# Altium PCB controlmodule.PcbDoc
Units mm, origin at the board's own origin, x right, y up, seen from the top; angles counter-clockwise.
Board outline 50 x 50 mm, 2 copper layers (Top Layer, Bottom Layer); 13 components, 19 nets, 70 pads, 7 vias.
Unrouted connection lines stored in the file: 1.
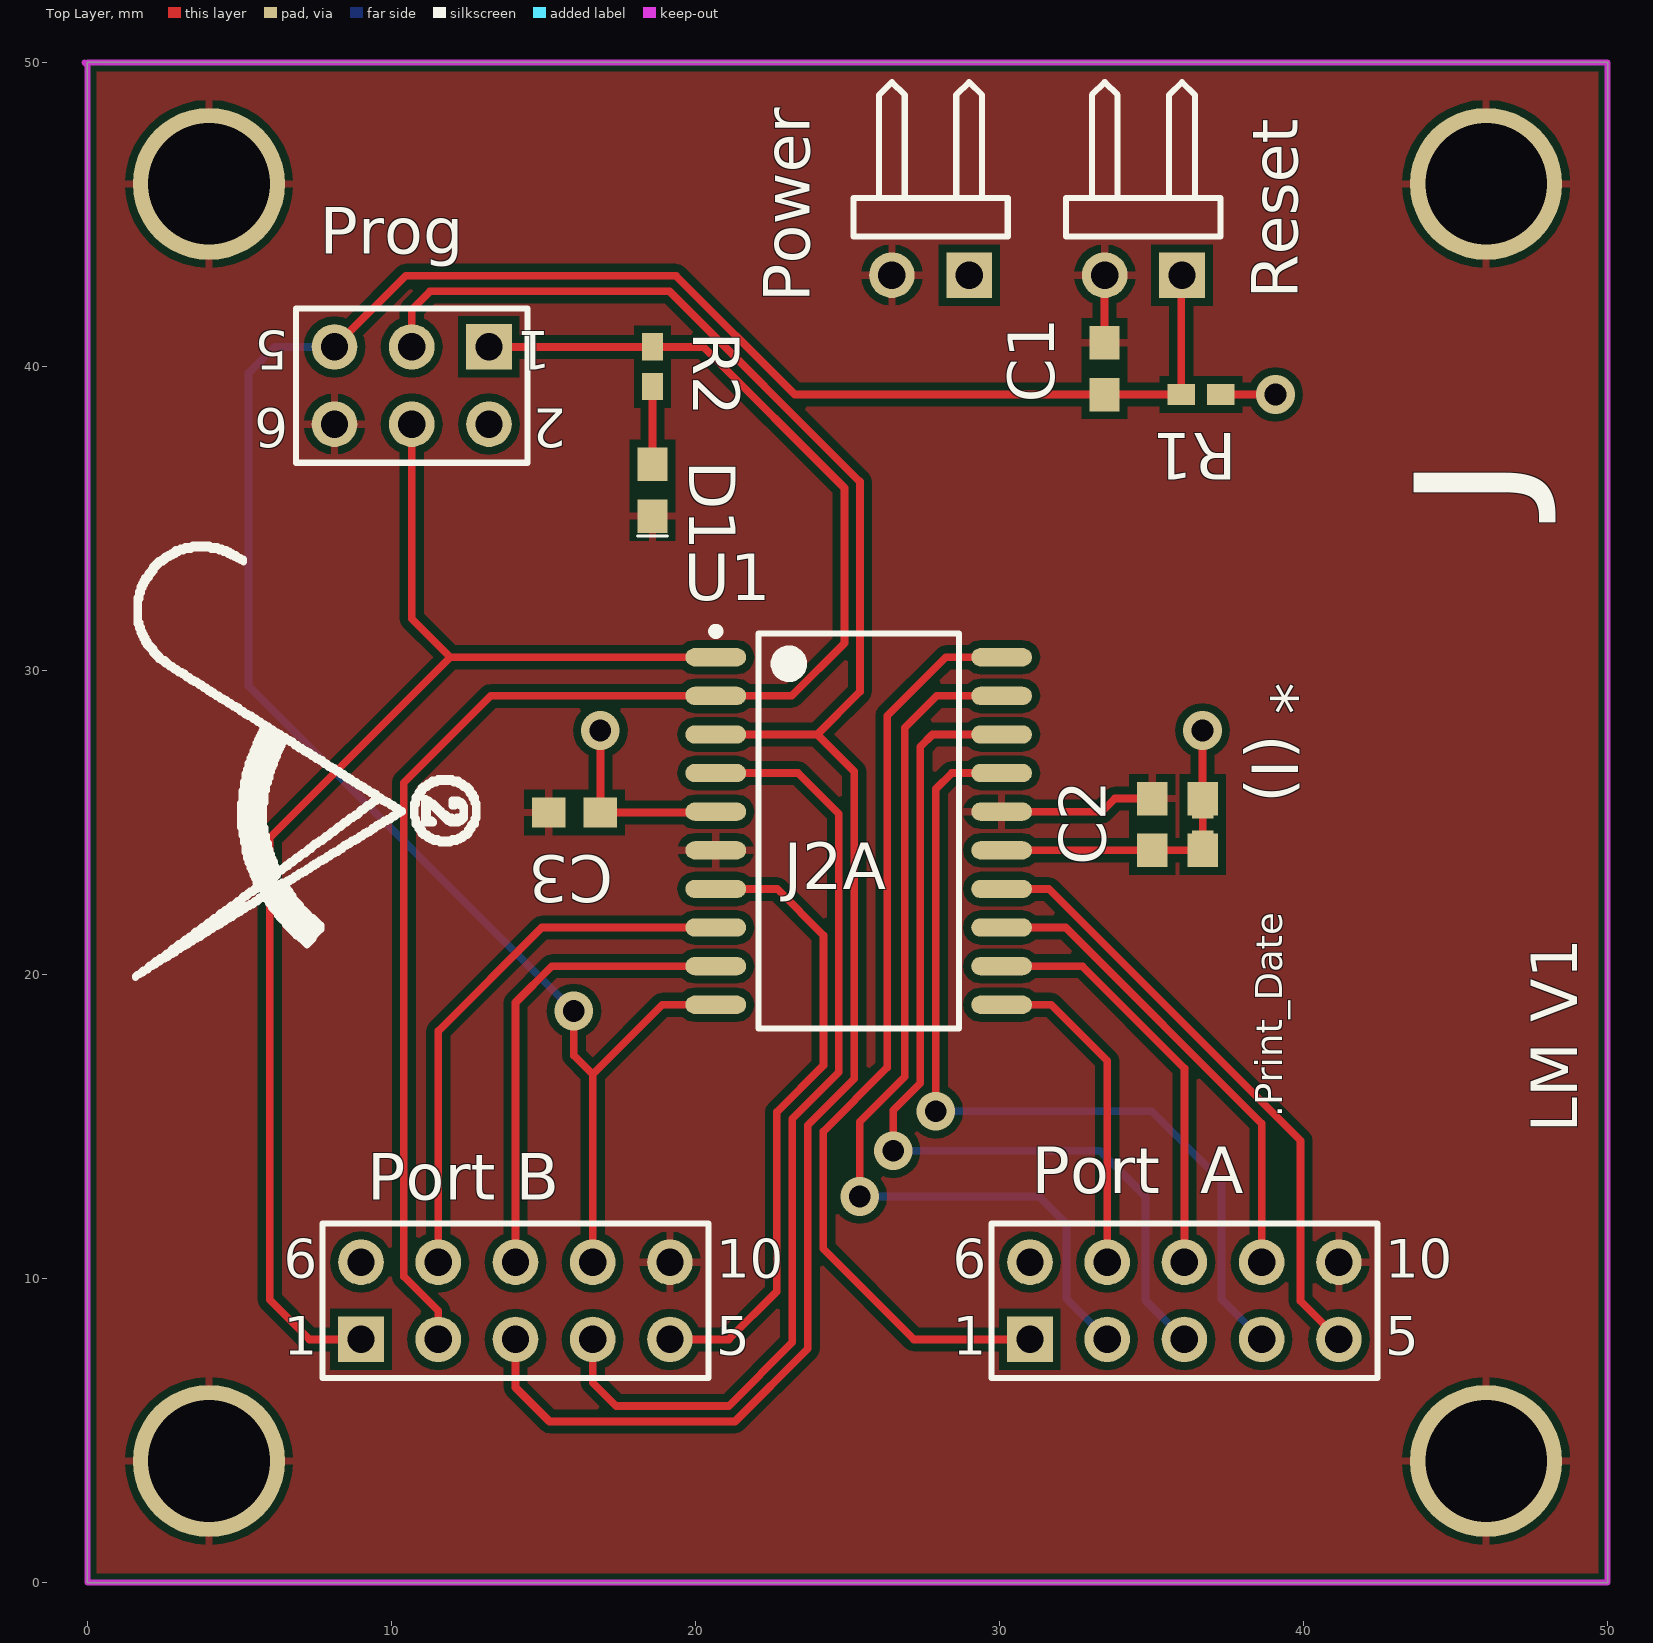
[diagram p0: Top Layer view]
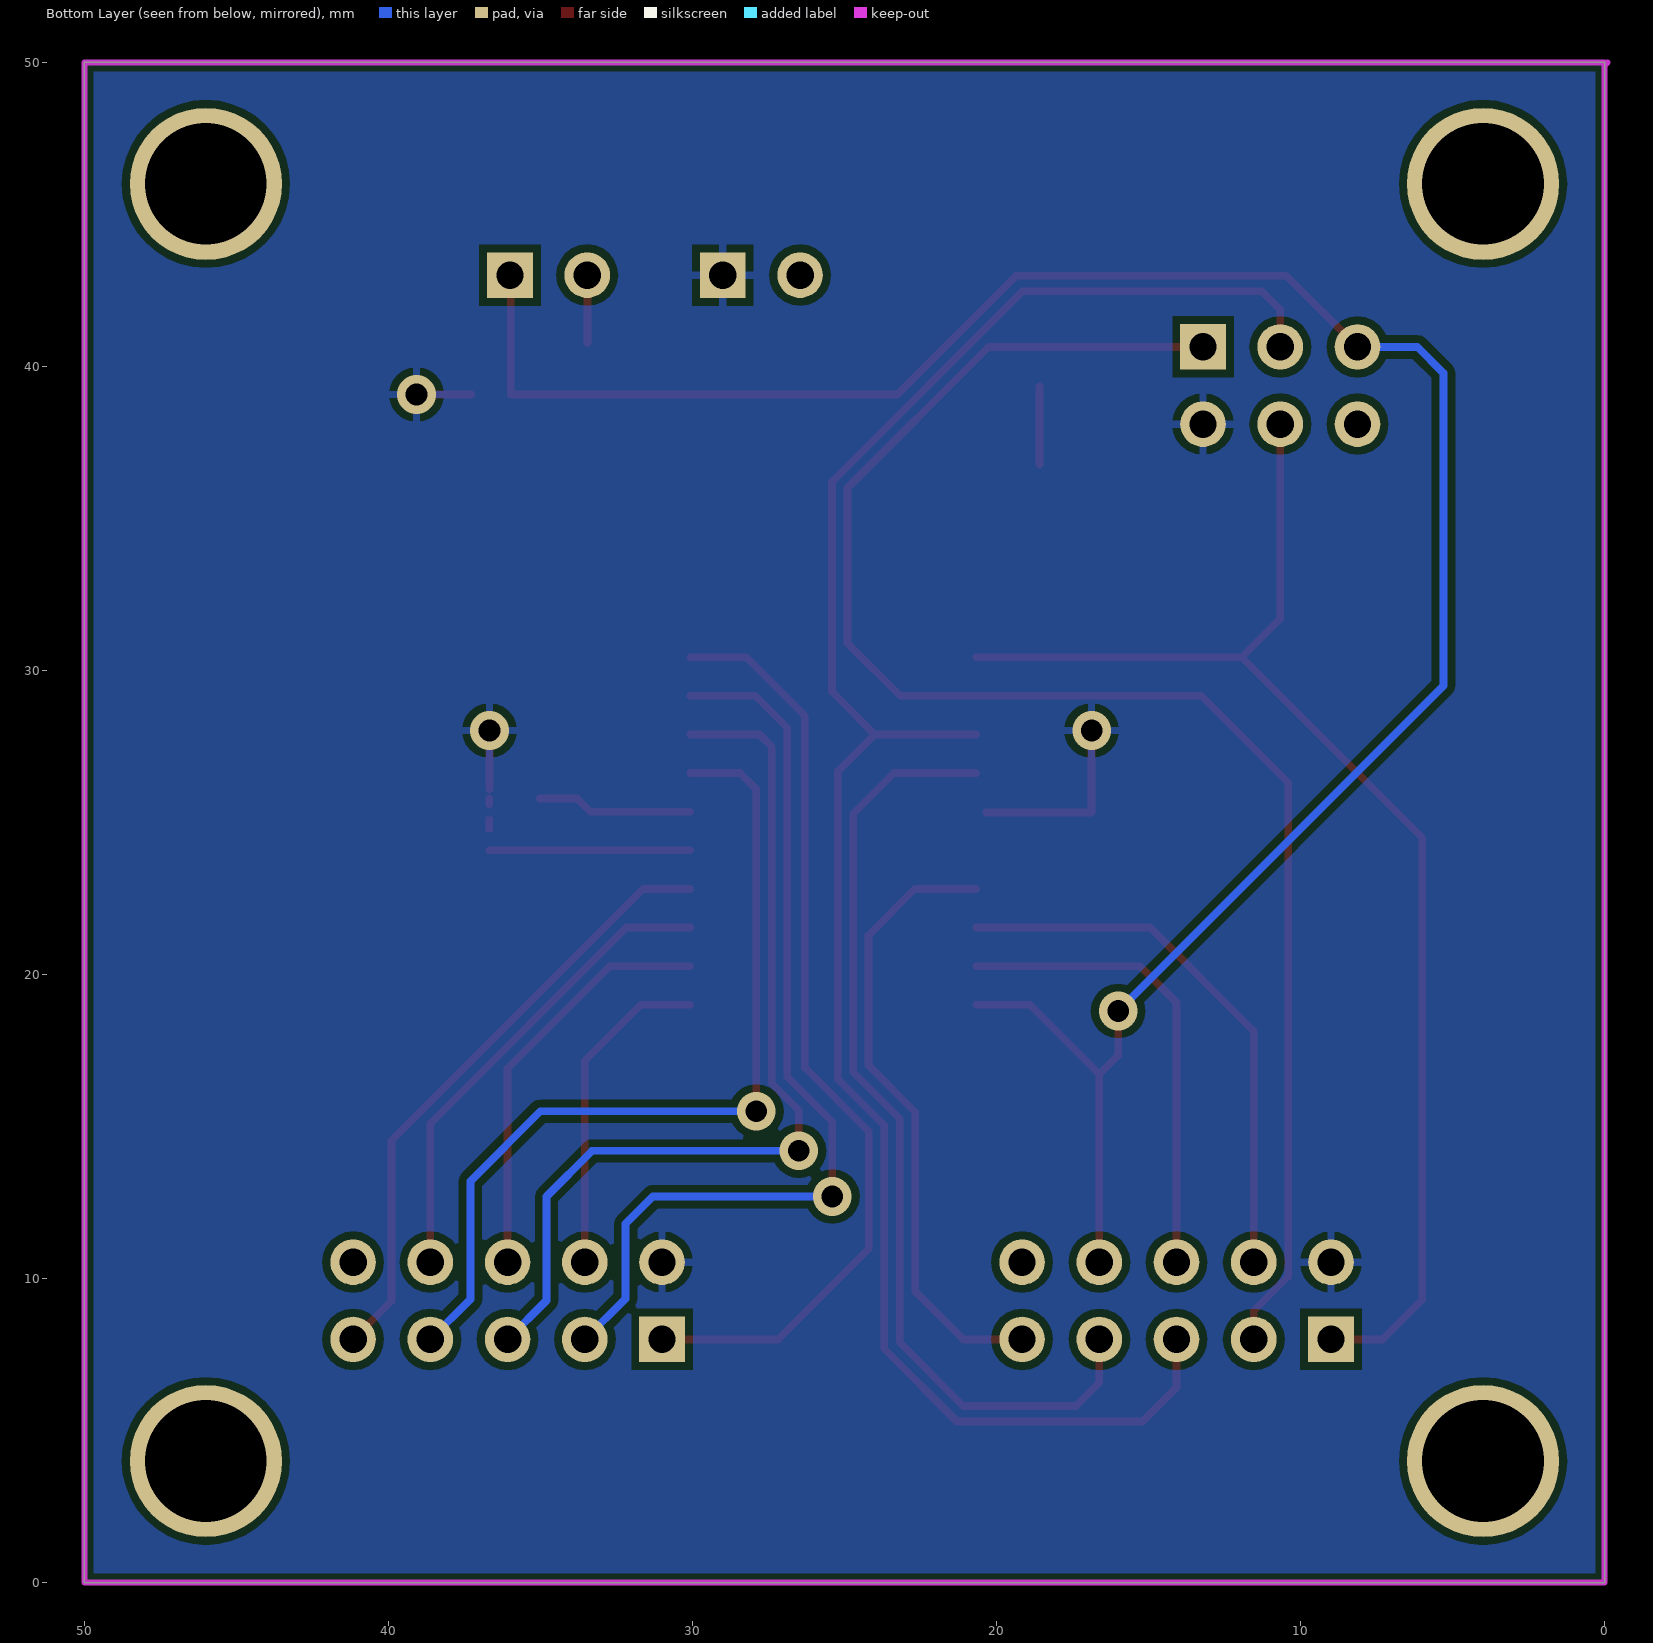
[diagram p1: Bottom Layer view, seen from below]

## Layer stack, top to bottom
Top Layer: signal copper 0.0356
Dielectric: core 0.32, FR-4, Dk 4.8
Bottom Layer: signal copper 0.0356

## Board outline
0,0 0,50 50,50 50,0

## Design rules (kind name [scope] priority, off if disabled: settings)
Clearance "Edge Clearance" [All vs OnLayer('Keep-Out Layer')] p1: gap=0.2 // keep copper from edges 1mm keepout line radius + 2mm
Clearance [All] p2: gap=0.254
HoleSize [All] p1: absolutevalues=TRUE maxlimit=6 minlimit=0.025 maxpercent=80.000 minpercent=20.000
MinimumSolderMaskSliver [All] p1: minsoldermaskwidth=0.1
PolygonConnect [All] p1: connectstyle=Relief reliefconductorwidth=0.254 reliefentries=4 polygonreliefangle="90 Angle"
RoomDefinition controlmodule [InComponentClass('controlmodule')] p1: confinementstyle=ConfineIn formatcopy=TRUE lockcomponents=FALSE outline 0,0 50,0 50,50 0,50
RoutingTopology [All] p1: topology=Starburst
RoutingVias [All] p1: holewidth=0.711 width=1.27 viastyle="Through Hole" minholewidth=0.711 minwidth=1.27 maxholewidth=0.711 maxwidth=1.27
SilkToSilkClearance [All] p1: silktosilkclearance=0.1
SilkscreenOverComponentPads [All] p1: minsilkscreentomaskgap=0.1
SolderMaskExpansion [All] p1: expansion=0.102
Width [All] p1: maxlimit=0.254 minlimit=0.254 preferedwidth=0.254
23 further rules are at their usual default settings.

## Components (designator, comment, footprint, x,y, rotation, side; value= is the part's Value field where it differs from the comment)
"* (I)" "NETTIE" NETTIE 36.685,24.935 r270 top net-tie
C1 "100pF" 1608[0603] 33.452,39.924 r270 top
C2 "100pF" 1608[0603] 35.02,24.935 r270 top
C3 "100pF" 1608[0603] 16.024,25.328 r0 top
D1 "LED" "1608[0603] - LED" 18.586,35.926 r270 top
"Port  A" "Header 5X2A" HDR2X5_CEN 31,8 r0 top
"Port B" "Header 5X2A" HDR2X5_CEN 9,8 r0 top
Power "Header 2H" HDR1X2H 29,43 r180 top
Prog "Header 3X2" HDR2X3 13.208,40.64 r180 top
R1 "10k" 1005[0402] 36.624,39.074 r0 top
R2 "220" 1005[0402] 18.586,39.99 r270 top
Reset "Header 2H" HDR1X2H 36,43 r180 top
U1 "ATtiny26L-8SC" 20S_N 25.368,24.72 r0 top

## Footprints (in the part's own frame and the unit in brackets; to place one, negate y for a bottom-side part, rotate by r counter-clockwise, add the part's x,y. Pads: shape width x height; smd on the part's side, far side on the other; paste and mask are expansions set on the pad)
20S_N [mm] "SOIC, 20-Leads, Body 12.8x7.5mm, Pitch 1.27mm, IPC Medium Density"
  oval 2x0.6 smd: 1(-4.7,5.715) 2(-4.7,4.445) 3(-4.7,3.175) 4(-4.7,1.905) 5(-4.7,0.635) 6(-4.7,-0.635) 7(-4.7,-1.905) 8(-4.7,-3.175) 9(-4.7,-4.445) 10(-4.7,-5.715) 11(4.7,-5.715) 12(4.7,-4.445) 13(4.7,-3.175) 14(4.7,-1.905) 15(4.7,-0.635) 16(4.7,0.635) 17(4.7,1.905) 18(4.7,3.175) 19(4.7,4.445) 20(4.7,5.715)
  silkscreen extent -4.82,-6.5 3.3,6.69, body extent -3.8,-6.5 3.8,6.5, height 2.67
1005[0402] [mm] "Chip Resistor; Body 1.1 x 0.5 mm (LxW typ)"
  rect 0.9x0.7 smd: 1(-0.65,0) 2(0.65,0)
1608[0603] [mm] "Chip Capacitor; Body 1.6 x 0.8 mm (LxW typ)"
  rect 1.1x1 smd: 1(-0.85,0) 2(0.85,0)
"1608[0603] - LED" [mm] "LED veriant met streepje"
  rect 1.1x1 smd: 1(-0.85,0) 2(0.85,0)
  silkscreen extent 1.5,-0.5 1.5,0.5
HDR1X2H [mm] "Connector; Header; 2 Position; Right Angle"
  rect 1.5x1.5 hole 0.9: 1(0,0)
  round 1.5 hole 0.9: 2(2.54,0)
  silkscreen extent -1.27,-6.35 3.81,-1.27
HDR2X3 [mm] "Connector; Header; 3x2 Position"
  rect 1.5x1.5 hole 0.9: 1(0,0)
  round 1.5 hole 0.9: 2(0,2.54) 3(2.54,0) 4(2.54,2.54) 5(5.08,0) 6(5.08,2.54)
  silkscreen extent -1.27,-1.27 6.35,3.81
HDR2X5_CEN [mm] "Connector; Header; 5x2 Position"
  rect 1.5x1.5 hole 0.9: 1(0,0)
  round 1.5 hole 0.9: 2(2.54,0) 3(5.08,0) 4(7.62,0) 5(10.16,0) 6(0,2.54) 7(2.54,2.54) 8(5.08,2.54) 9(7.62,2.54) 10(10.16,2.54)
  silkscreen extent -1.27,-1.27 11.43,3.81
NETTIE [mm] "use to tie nets together"
  rect 1.1x1 smd: 1(-0.85,0) 2(0.85,0)
  rect 0.9x0.7 smd: 1(-0.65,0) 2(0.65,0)
  Top Layer region: -0.254,-0.127 0.254,-0.127 0.254,0.127 -0.254,0.127

## Part data
"* (I)": "connects 2 nets, connect both terminals or shit goes down"
C1 C2 C3: library part Cap_mm, "Capacitor"
"Port  A" "Port B": "Header, 5-Pin, Dual row"
Power Reset: "Header, 2-Pin, Right Angle"
Prog: "Header, 3-Pin, Dual row"
R1 R2: library part Res_mm, "Resistor"
U1: "8-Bit AVR Microcontroller with 2K Bytes of Flash Memory"

## Free pads (board coordinates)
  round 5 hole 4: 0(4,4) 0(4,46) 0(46,4) 0(46,46)

## Via types
v1: diameter 1.27, hole 0.711, Top Layer to Bottom Layer, 7 vias

## Nets (pads, with @x,y where several pads share a name; then routed paths per layer and width w, separated by ;. In a path a pad name is that pad's centre, name@x,y a point inside that pad or via, vN(x,y) a via of type N, cw(c..) or ccw(c..) an arc to the next point about the centre after c; other vN are vias at no path point)
0: "Port  A.10" "Port B.10" C1.1 C2.1 C3.1 D1.2 pad.0 Power.2 Prog.6 Reset.2 U1.6 U1.16 | length 7.4
  Top Layer w0.254: U1.16 33.355,25.355 33.785,25.785 C2.1 ; C1.1 Reset.2@33.452,43
5VR: "* (I).1" "* (I).2" "Port  A.6" "Port B.6" C2.2 C3.2 Power.1 Prog.2 R1.2 U1.5 U1.15 | length 16.7
  Top Layer w0.254: v1(16.874,28.026) C3.2 U1.5@20.341,25.328 ; U1.15 C2.2 36.685,24.085 ; 36.674,26.104 v1(36.674,28.026) ; 36.685,25.585 36.685,25.785 ; R1.2 v1(39.074,39.074)
"A1 PWM": "Port  A.1" U1.20 | length 31
  Top Layer w0.254: U1.20 28.235,30.435 26.309,28.509 26.309,16.944 24.2,14.835 24.2,10.98 27.18,8 31,8
"A2 PWM": "Port  A.2" U1.19 | length 31.2
  Top Layer w0.254: v1(25.4,12.7) 25.4,15.155 26.884,16.639 26.884,28.11 27.939,29.165 U1.19
  Bottom Layer w0.254: v1(25.4,12.7) 31.3,12.7 32.2,11.8 32.2,9.34 33.54,8
"B1 PWM": "Port  A.3" U1.18 | length 30.9
  Top Layer w0.254: v1(26.5,14.2) 26.3,14.2 26.4,14.3 26.5,14.4 26.5,15.537 27.392,16.429 27.392,27.492 27.795,27.895 U1.18
  Bottom Layer w0.254: v1(26.5,14.2) 33.3,14.2 34.8,12.7 34.8,9.28 36.08,8
"B2 PWM": "Port  A.4" U1.17 | length 29.1
  Top Layer w0.254: v1(27.9,15.5) 27.9,26.1 28.425,26.625 U1.17
  Bottom Layer w0.254: v1(27.9,15.5) 35,15.5 37.3,13.2 37.3,9.32 38.62,8
ENABLE: "Port  A.5" U1.14 | length 20.3
  Top Layer w0.254: U1.14 31.622,22.815 39.9,14.537 39.9,9.26 41.16,8
NetD1_1: D1.1 R2.2 | length 2.6
  Top Layer w0.254: D1.1 R2.2
"NetPort  A_7": "Port  A.7" U1.11 | length 10.7
  Top Layer w0.254: U1.11 31.695,19.005 33.54,17.16 33.54,10.7
"NetPort  A_8": "Port  A.8" U1.12 | length 13.6
  Top Layer w0.254: U1.12 32.725,20.275 36.08,16.92 36.08,10.72
"NetPort  A_9": "Port  A.9" U1.13 | length 15.8
  Top Layer w0.254: U1.13 32.173,21.545 38.62,15.098 38.62,10.54
PB0_MOSI: "Port B.1" Prog.4 U1.1 | length 44.1
  Top Layer w0.254: 9,8 7.3,8 6,9.3 6,24.5 11.935,30.435 ; Prog.4 10.668,31.702 11.935,30.435 ; U1.1 11.935,30.435
PB1_MISO: "Port B.2" Prog.1 R2.1 U1.2 | length 53.9
  Top Layer w0.254: 11.54,8 11.54,8.941 10.409,10.072 10.409,26.309 13.265,29.165 U1.2 23.165,29.165 24.9,30.9 24.9,36 20.26,40.64 R2.1 Prog.1
PB2_SCK: "Port B.3" Prog.3 U1.3 | length 65
  Top Layer w0.254: Prog.3 10.668,41.868 11.272,42.472 19.146,42.472 25.408,36.21 25.408,29.298 24.005,27.895 ; 14.08,8 14.08,6.42 15.2,5.3 21.3,5.3 23.692,7.692 23.692,15.045 25.223,16.577 25.223,26.677 24.005,27.895 ; U1.3 24.005,27.895
PB3: "Port B.4" U1.4 | length 31.8
  Top Layer w0.254: 16.62,8 16.62,6.58 17.392,5.808 21.09,5.808 23.184,7.902 23.184,15.256 24.715,16.787 24.715,25.285 23.375,26.625 U1.4
PB4_XTAL1: "Port B.5" U1.7 | length 20.7
  Top Layer w0.254: 19.16,8 21.1,8 22.676,9.576 22.676,15.476 24.207,17.007 24.207,21.293 22.685,22.815 U1.7
PB5_XTAL2: "Port B.7" U1.8 | length 18.1
  Top Layer w0.254: 11.54,10.54 11.54,18.14 14.945,21.545 U1.8
PB6_INT0: "Port B.8" U1.9 | length 15.6
  Top Layer w0.254: 14.08,10.54 14.08,19.08 15.275,20.275 U1.9
PB7_RESET: "Port B.9" C1.2 Prog.5 R1.1 Reset.1 U1.10 | length 76.5
  Top Layer w0.254: Prog.5 10.468,42.98 19.357,42.98 23.263,39.074 C1.2 R1.1 Reset.1@35.974,43 ; v1(16,18.8) 16,17.34 16.62,16.72 ; 16.62,10.54 16.62,16.72 ; U1.10 18.905,19.005 16.62,16.72
  Bottom Layer w0.254: Prog.5 6.16,40.64 5.3,39.78 5.3,29.5 v1(16,18.8)

## Polygon pours and split planes (outlines as drawn)
0 on Top Layer "Top Layer-No Net" (solid, remove dead copper, pour order 1000): 0,0 50,0 50,50 0,50
5VR on Bottom Layer "Top Layer-No Net" (solid, pour order 1001): 0,0 50,0 50,50 0,50

## Keep-outs
Keep-Out Layer:
  lines w0.2: -0.1,50 0,49.9 ; 0,0 0,50 50,50 50,0 0,0

## Silkscreen, mask and mechanical layers (free items; w line width, h text height)
Top Overlay:
  drawing of 693 lines, arcs and shapes, not listed
  text "J" at 48.873,35.2 h10 r90
  text "J2A" at 22.9,22.8 h1.52
  text ".Print_Date" at 39.6,15.3 h1.52 r90
  text "LM V1" at 49,14.8 h1.52 r90

## Text inside footprints (layer, text, board x,y; h text height)
"Port  A": Top Overlay "6" at 28.46,10.032 h1.27; Top Overlay "10" at 42.684,10.032 h1.27; Top Overlay "5" at 42.684,7.492 h1.27; Top Overlay "1" at 28.46,7.492 h1.27
"Port B": Top Overlay "6" at 6.46,10.032 h1.27; Top Overlay "10" at 20.684,10.032 h1.27; Top Overlay "5" at 20.684,7.492 h1.27; Top Overlay "1" at 6.46,7.492 h1.27
Prog: Top Overlay "6" at 6.604,38.608 h1.27 r180; Top Overlay "5" at 6.604,41.148 h1.27 r180; Top Overlay "2" at 15.748,38.608 h1.27 r180; Top Overlay "1" at 15.24,41.148 h1.27 r180